# Altium PCB PCB1.PcbDoc
Units mm, origin at the board's own origin, x right, y up, seen from the top; angles counter-clockwise.
Board outline 46.1 x 48.13 mm, 2 copper layers (Top Layer, Bottom Layer); 19 components, 28 nets, 101 pads, 20 vias.
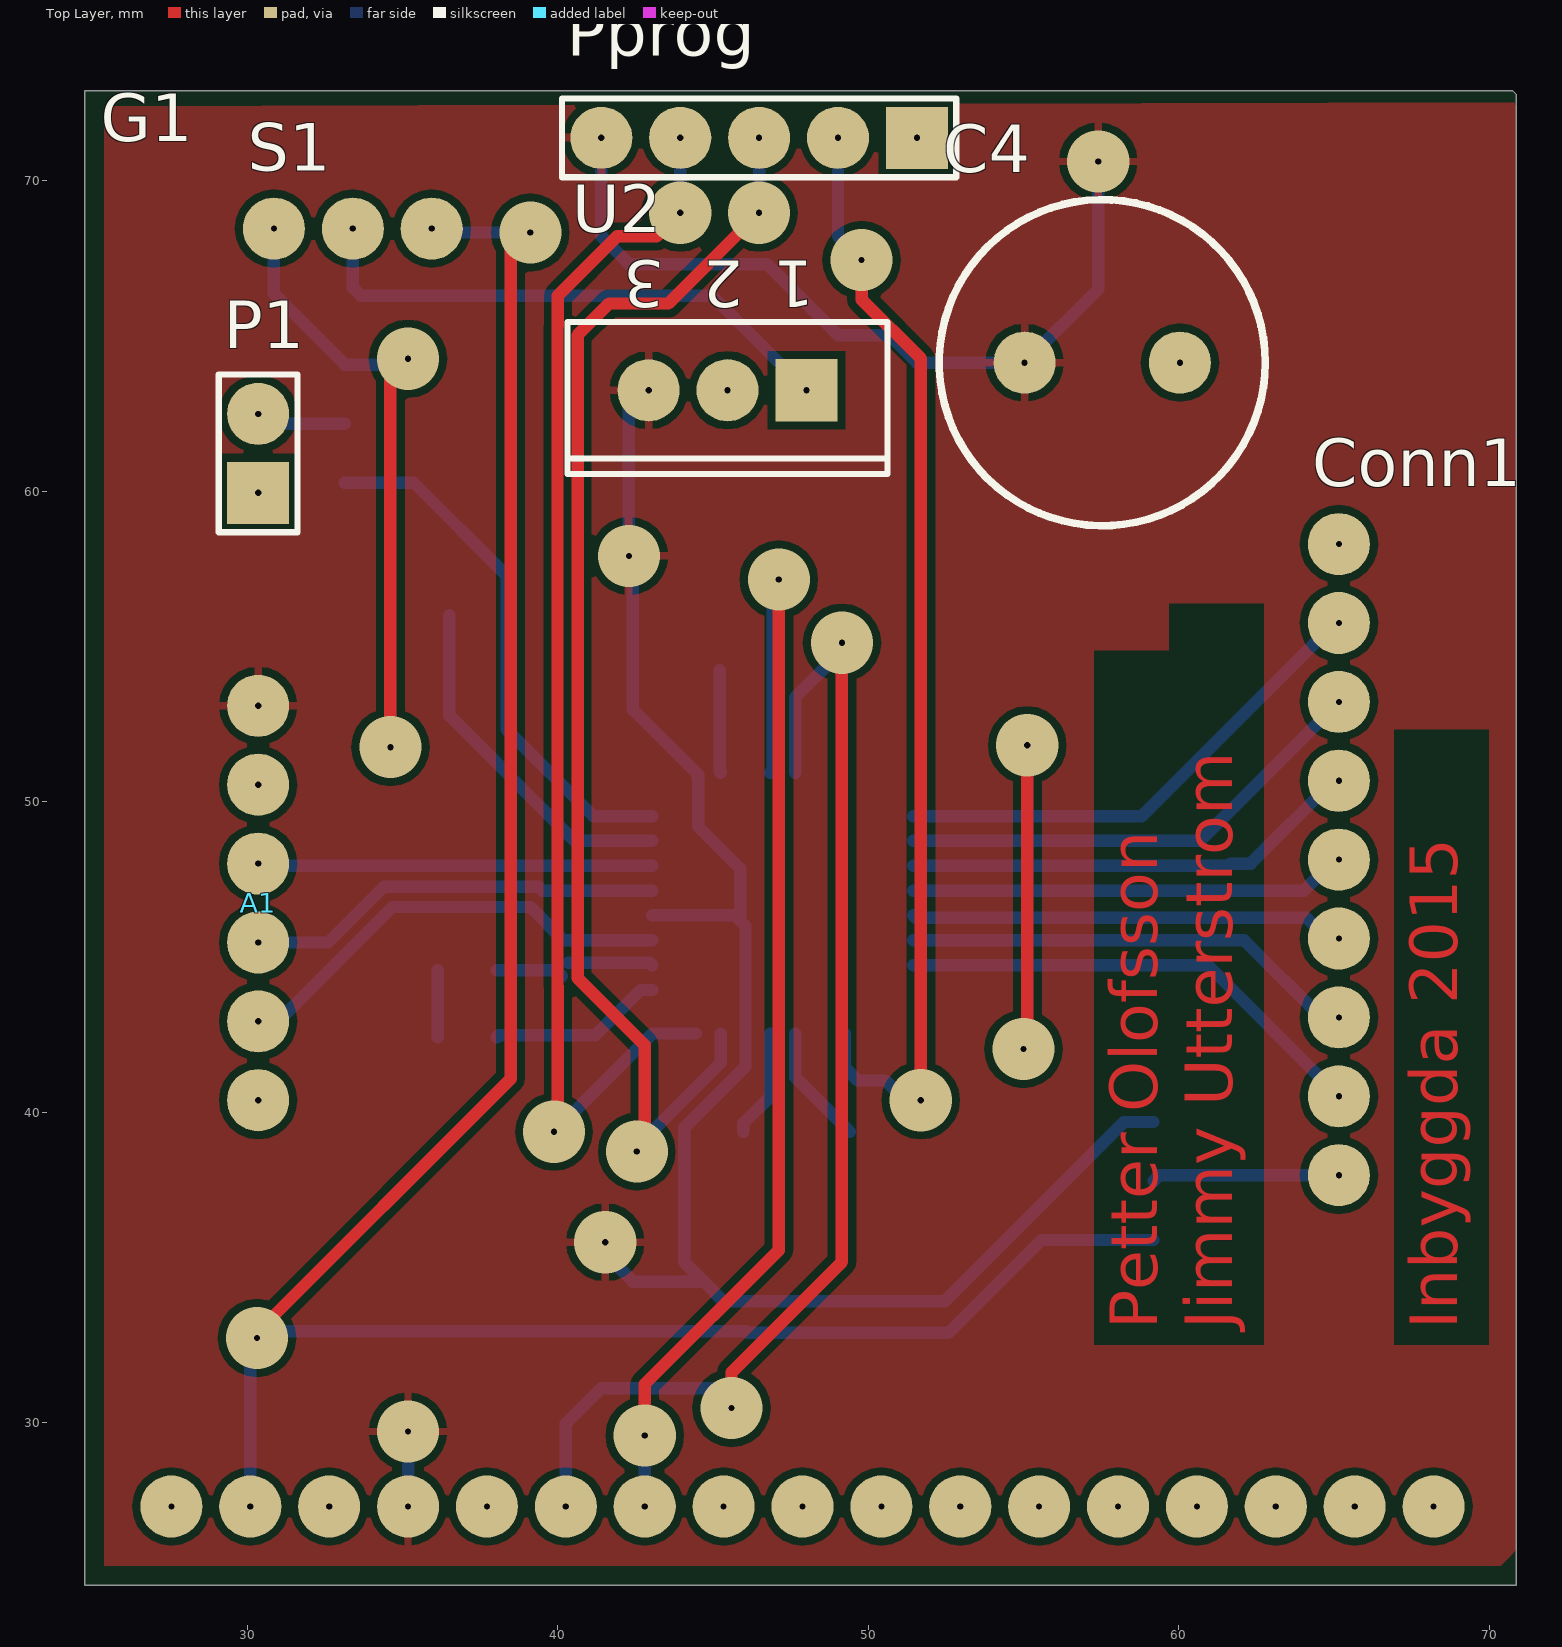
[diagram p0: Top Layer view]
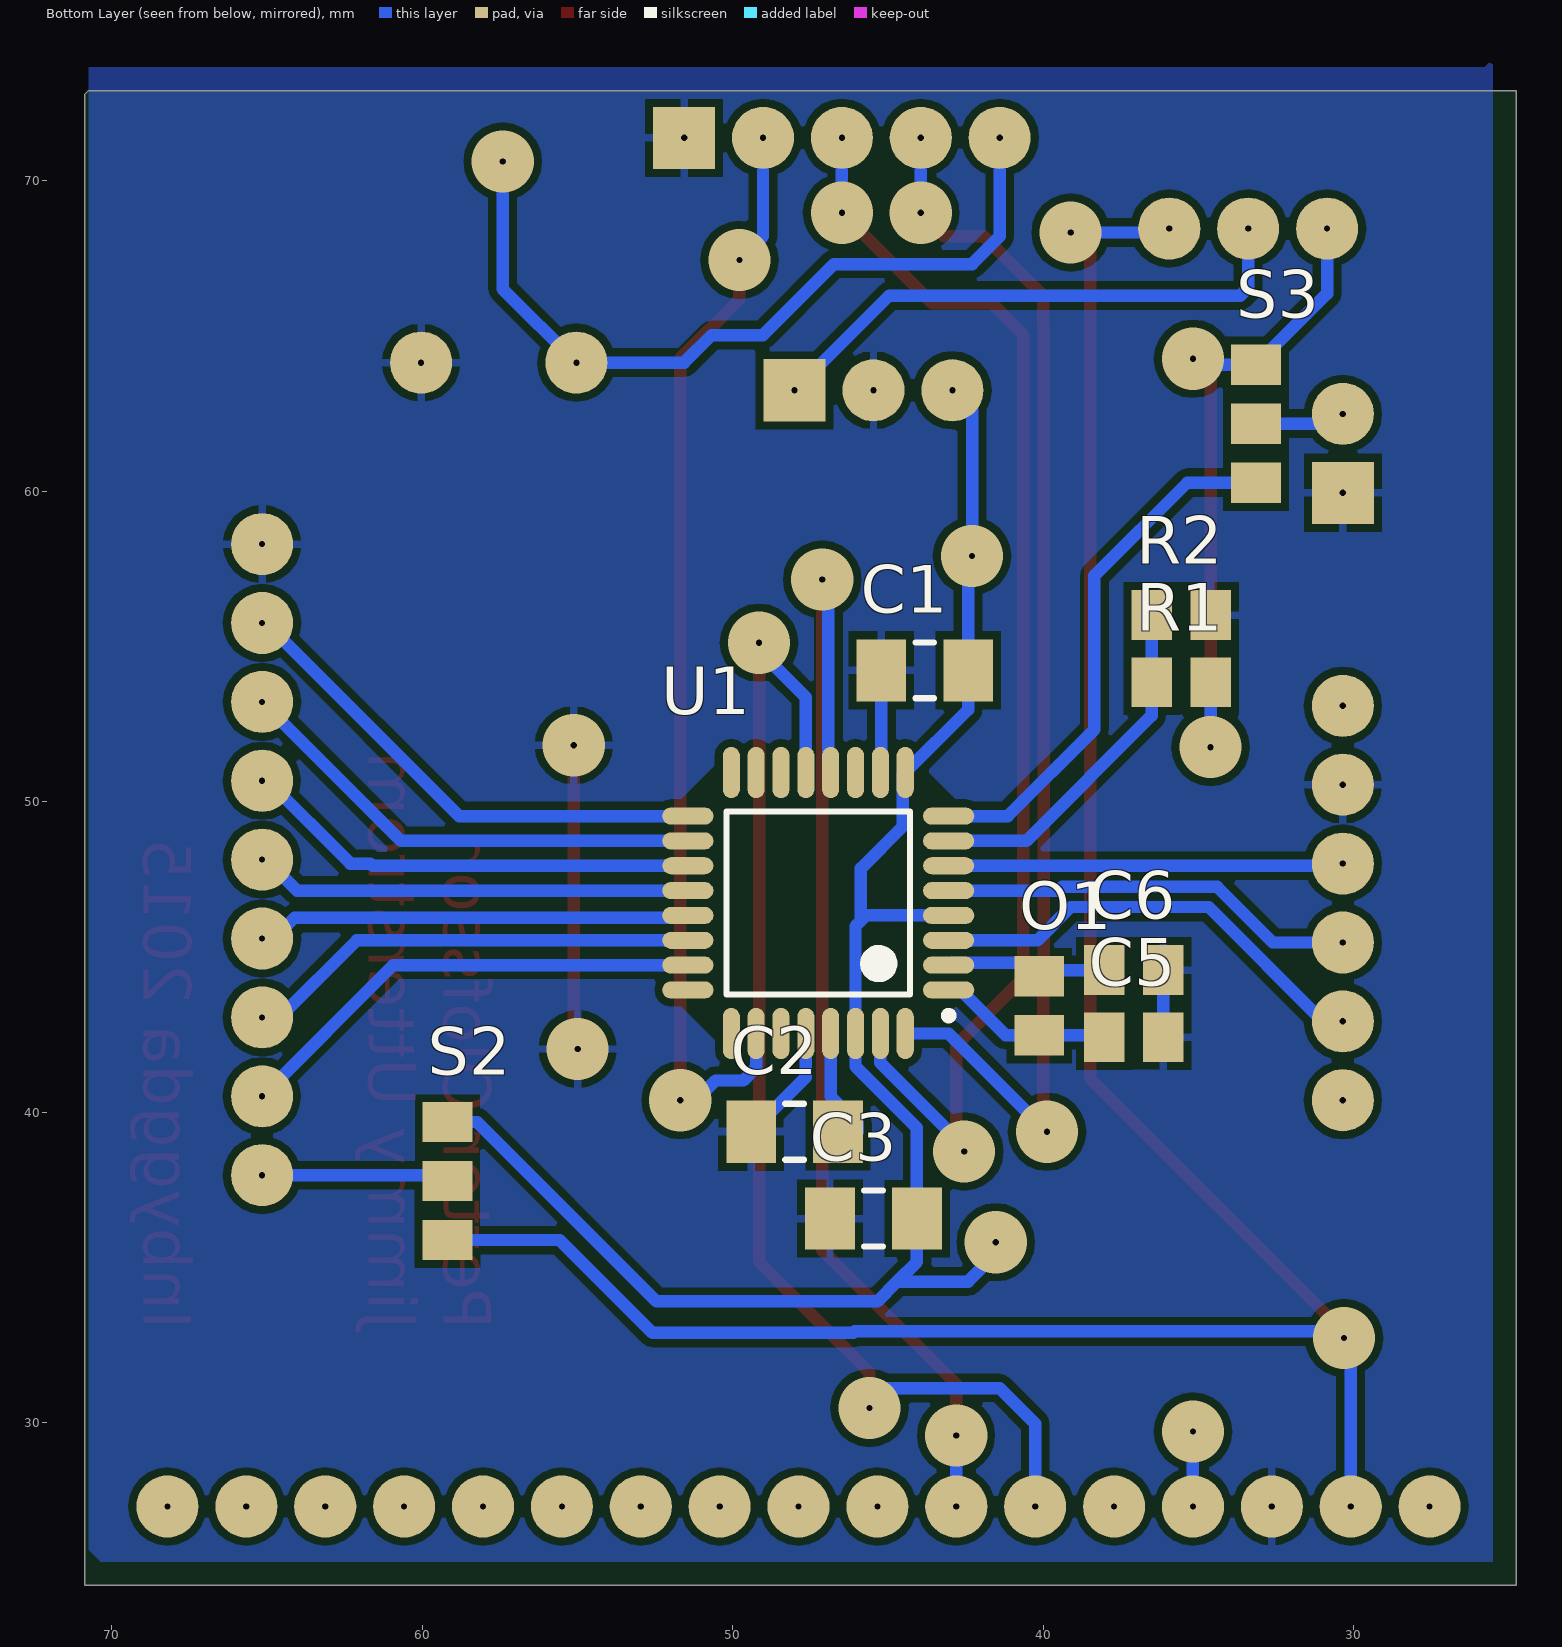
[diagram p1: Bottom Layer view, seen from below]

## Layer stack, top to bottom
Top Layer: signal copper 0.0356
Dielectric: dielectric 0.32, FR-4, Dk 4.8
Bottom Layer: signal copper 0.0356

## Board outline
24.765,72.898 24.765,24.765 70.866,24.765 70.866,72.771 70.739,72.898

## Design rules (kind name [scope] priority, off if disabled: settings)
Clearance [All] p1: gap=0.25
MinimumSolderMaskSliver [All] p1: minsoldermaskwidth=0.01
PolygonConnect [All] p1: connectstyle=Relief reliefconductorwidth=0.254 reliefentries=4 polygonreliefangle="90 Angle"
RoutingVias [All] p1: holewidth=0.2 width=2 viastyle="Through Hole" minholewidth=0.2 minwidth=2 maxholewidth=0.2 maxwidth=2
SilkscreenOverComponentPads [All] p1: minsilkscreentomaskgap=0.254
SolderMaskExpansion [All] p1: expansion=0.102
Width [All] p1: maxlimit=1 minlimit=0.4 preferedwidth=0.4
26 further rules are at their usual default settings.

## Components (designator, comment, footprint, x,y, rotation, side; value= is the part's Value field where it differs from the comment)
A1 "ADXL335" ADXL 30.353,40.386 r90 top
C1 "Cap" R3216-1206 43.815,54.229 r180 bottom
C2 "Cap" R3216-1206 48.006,39.37 r0 bottom
C3 "Cap" R3216-1206 45.466,36.576 r180 bottom
C4 "Cap Pol1" RB5-10.5 57.531,64.135 r0 top
C5 "Cap" R2012-0805 37.084,42.418 r0 bottom
C6 "Cap" R2012-0805 37.084,44.577 r0 bottom
Conn1 "Disp connector" "9pin 2.54" 65.151,37.973 r90 top
G1 "FONA808" FONA808 27.559,27.305 r0 top
O1 "OSC" R2012-0805 40.132,43.434 r90 bottom
P1 "Header 2" HDR1X2 30.353,59.944 r90 top
Pprog "Header 5" HDR1X5 51.562,71.374 r180 top
R1 "Res2" R2012-0805 35.56,53.848 r0 bottom
R2 "Res2" R2012-0805 35.56,56.007 r180 bottom
S1 "SW-SPDT" SW-SPDT2.54mm 35.941,68.453 r180 top
S2 "smd_bridge" SMD_BRIDGE 59.182,38.735 r270 bottom
S3 "smd_bridge" SMD_BRIDGE 33.147,63.119 r270 bottom
U1 "SAMD21e18" TQFP32_N 47.244,46.736 r0 bottom
U2 "7803" 221A-04 45.466,63.246 r180 top

## Footprints (in the part's own frame and the unit in brackets; to place one, negate y for a bottom-side part, rotate by r counter-clockwise, add the part's x,y. Pads: shape width x height; smd on the part's side, far side on the other; paste and mask are expansions set on the pad)
"9pin 2.54" [mm]
  round 2 hole 0.2: 1(0,0) 2(2.54,0) 3(5.08,0) 4(7.62,0) 5(10.16,0) 6(12.7,0) 7(15.24,0) 8(17.78,0) 9(20.32,0)
  body extent -1.1,-1.1 21.42,1.1, height 8
221A-04 [mm] "TO, Thru-Hole, Vertical, Heatsink Mounted; 3 In-Line Leads; Pitch 2.54 mm"
  rect 2x2 hole 0.2: 1(-2.54,0)
  round 2 hole 0.2: 2(0,0) 3(2.54,0)
  silkscreen extent -5.15,-2.2 5.15,2.7
ADXL [mm]
  round 2 hole 0.2: 1(0,0) 2(2.54,0) 3(5.08,0) 4(7.62,0) 5(10.16,0) 6(12.7,0)
  body extent -2.54,-2.54 15.24,22.86, height 6
FONA808 [mm]
  round 2 hole 0.2: 1(0,0) 2(2.54,0) 3(5.08,0) 4(7.62,0) 5(10.16,0) 6(12.7,0) 7(15.24,0) 8(17.78,0) 9(20.32,0) 10(22.86,0) 11(25.4,0) 12(27.94,0) 13(30.48,0) 14(33.02,0) 15(35.56,0) 16(38.1,0) 17(40.64,0)
  body extent -2.54,-2.54 43.18,43.18, height 11
HDR1X2 [mm] "Connector; Header; 2 Position"
  rect 2x2 hole 0.2: 1(0,0)
  round 2 hole 0.2: 2(2.54,0)
  silkscreen extent -1.27,-1.27 3.81,1.27
HDR1X5 [mm] "Connector; Header; 5 Position"
  rect 2x2 hole 0.2: 1(0,0)
  round 2 hole 0.2: 2(2.54,0) 3(5.08,0) 4(7.62,0) 5(10.16,0)
  silkscreen extent -1.27,-1.27 11.43,1.27
R2012-0805 [mm] "SMD 2012-0805"
  rect 1.3x1.6 smd: 1(-0.95,0) 2(0.95,0)
  body extent -1.7,-0.9 1.7,0.9, height 1.45
R3216-1206 [mm] "SMD 3216 - 1206"
  rect 1.6x2 smd: 1(-1.4,0) 2(1.4,0)
  silkscreen extent -0.3,-0.9 0.3,0.9, body extent -2.3,-1.1 2.3,1.1, height 1.85
RB5-10.5 [mm] "Capacitor (Radial); 2 Leads"
  round 2 hole 0.2: 1(-2.5,0) 2(2.5,0)
  silkscreen extent -5.25,-5.25 5.25,5.25
SMD_BRIDGE [mm] "SMD 2012-0805"
  rect 1.3x1.6 smd: 1(-0.95,0) 2(0.95,0) 3(2.85,0)
  body extent -1.7,-0.9 3.6,0.9, height 1
SW-SPDT2.54mm [mm]
  round 2 hole 0.2: 1(0,0) 2(2.54,0) 3(5.08,0)
  body extent -1.1,-1.1 6.18,1.1, height 5
TQFP32_N [mm] "32-Pin Thin Quad Flat Pack 0.8 mm Pitch, IPC Medium Density"
  oval 1.65x0.55 smd: 1(-4.2,2.8) 2(-4.2,2) 3(-4.2,1.2) 4(-4.2,0.4) 5(-4.2,-0.4) 6(-4.2,-1.2) 7(-4.2,-2) 8(-4.2,-2.8) 17(4.2,-2.8) 18(4.2,-2) 19(4.2,-1.2) 20(4.2,-0.4) 21(4.2,0.4) 22(4.2,1.2) 23(4.2,2) 24(4.2,2.8)
  oval 0.55x1.65 smd: 9(-2.8,-4.2) 10(-2,-4.2) 11(-1.2,-4.2) 12(-0.4,-4.2) 13(0.4,-4.2) 14(1.2,-4.2) 15(2,-4.2) 16(2.8,-4.2) 25(2.8,4.2) 26(2,4.2) 27(1.2,4.2) 28(0.4,4.2) 29(-0.4,4.2) 30(-1.2,4.2) 31(-2,4.2) 32(-2.8,4.2)
  silkscreen extent -4.32,-2.95 2.95,3.75, body extent -3.5,-3.5 3.5,3.5, height 1.6

## Part data
C1 C2 C3 C5 C6: "Capacitor"
C4: "Polarized Capacitor (Radial)"
O1: library part Res2, "Resistor"
P1: "Header, 2-Pin"
Pprog: "Header, 5-Pin"
R1 R2: "Resistor"
S1: "SPDT Subminiature Toggle Switch, Right Angle Mounting, Vertical Actuation"
U2: "3-Terminal Positive Fixed Voltage Regulator"

## Via types
v1: diameter 2, hole 0.2, Top Layer to Bottom Layer, 20 vias

## Nets (pads, with @x,y where several pads share a name; then routed paths per layer and width w, separated by ;. In a path a pad name is that pad's centre, name@x,y a point inside that pad or via, vN(x,y) a via of type N, cw(c..) or ccw(c..) an arc to the next point about the centre after c; other vN are vias at no path point)
"ACC X": A1.4 U1.6 | length 12.7
  Bottom Layer w0.4: A1.4 30.423,47.936 U1.6
"ACC Y": A1.3 U1.5 | length 13.5
  Bottom Layer w0.4: A1.3 32.609,45.466 34.402,47.259 39.385,47.259 39.508,47.136 U1.5
"ACC Z": A1.2 U1.3 | length 14
  Bottom Layer w0.4: A1.2@30.988,42.926 34.671,46.609 39.116,46.609 40.189,45.536 U1.3
"EXT POW": R1.1 S1.3 S3.1 | length 22.4
  Top Layer w0.4: v1(34.61,51.755) 34.61,63.82 35.052,64.262 v1(35.179,64.262)
  Bottom Layer w0.4: S1.3 30.861,66.355 S3.1 34.986,64.069 v1(35.179,64.262) ; v1(34.61,51.755) R1.1
"EXT POW MEAS": R1.2 R2.1 U1.7 | length 11.4
  Bottom Layer w0.4: R1.2 36.51,52.771 40.545,48.736 U1.7 ; R1.2@36.51,53.914 R2.1
"FONA BAT": G1.2 S1.1 S2.3 | length 77.8
  Top Layer w0.4: v1(30.316,32.729) 30.226,32.819 38.481,41.074 v1@38.481,68.326
  Bottom Layer w0.4: v1@29.998,33.046 v1(30.316,32.729) ; G1.2 30.099,32.512 v1(30.316,32.729) ; S1.1 36.068,68.326 v1@38.481,68.326 ; S2.3 55.57,35.885 52.578,32.893 46.12,32.893 46.067,32.946 30.533,32.946 v1(30.316,32.729)
  other v1: 39.116,68.326
"FONA RX": G1.6 U1.13 | length 38.9
  Top Layer w0.4: v1(45.593,30.48) 45.593,31.623 49.149,35.179 v1(49.149,55.118)
  Bottom Layer w0.4: G1.6 40.259,29.972 41.402,31.115 v1@45.085,31.115 ; U1.13 47.644,53.359 49.149,54.864 v1(49.149,55.118)
"FONA TX": G1.7 U1.12 | length 38
  Top Layer w0.4: v1(42.799,29.591) 42.799,31.242 47.117,35.56 v1(47.117,57.15)
  Bottom Layer w0.4: G1.7 v1(42.799,29.591) ; U1.12 46.919,51.011 46.919,56.952 v1(47.117,57.15)
GND: A1.5 C1.1 C2.2 C3.1 C4.2 C5.1 C6.1 Conn1.9 G1.3 P1.1 Pprog.1 R2.2 U1.10 U1.28 U2.2 | length 21.2
  Top Layer w0.4: v1(54.991,42.037) 55.118,41.91 v1(55.118,51.816)
  Bottom Layer w0.4: C5.1 C6.1 ; C1.1 45.215,50.965 U1.10 ; U2.2@45.215,62.995 U2.2 ; U1.28 47.644,41.132 C2.2 ; v1@54.356,42.037 v1(54.991,42.037) ; C4.2@60.031,63.413 C4.2
KADENS!!: S3.3 U1.8 | length 17.2
  Bottom Layer w0.4: S3.3 35.362,60.269 38.354,57.277 38.354,52.324 41.142,49.536 U1.8
KEY: G1.9
NetC2_1: C2.1 U1.29 | length 3.5
  Bottom Layer w0.4: C2.1@45.971,39.37 45.971,39.64 46.844,40.513 U1.29
NetC5_2: C5.2 O1.1 U1.1 | length 5.6
  Bottom Layer w0.4: C5.2 38.1,42.484 O1.1 41.214,42.484 42.666,43.936 U1.1
NetC6_2: C6.2 O1.2 U1.2 | length 4.9
  Bottom Layer w0.4: C6.2 39.939,44.577 O1.2 ; O1.2@40.34,44.811 42.969,44.811 U1.2
NetConn1_1: Conn1.1 S2.2 | length 6.1
  Bottom Layer w0.4: S2.2@59.187,37.78 S2.2 59.37,37.973 Conn1.1
NetConn1_2: Conn1.2 U1.23 | length 15.5
  Bottom Layer w0.4: U1.23 60.928,44.736 Conn1.2
NetConn1_3: Conn1.3 U1.22 | length 14.7
  Bottom Layer w0.4: U1.22 62.103,45.536 64.586,43.053 Conn1.3
NetConn1_4: Conn1.4 U1.21 | length 14
  Bottom Layer w0.4: U1.21 51.519,46.261 64.102,46.261 64.77,45.593 Conn1.4
NetConn1_5: Conn1.5 U1.20 | length 14.1
  Bottom Layer w0.4: U1.20 64.027,47.136 65.024,48.133 Conn1.5
NetConn1_6: Conn1.6 U1.19 | length 14.8
  Bottom Layer w0.4: U1.19 61.595,47.936 61.665,48.006 62.308,48.006 64.975,50.673 Conn1.6
NetConn1_7: Conn1.7 U1.18 | length 15.6
  Bottom Layer w0.4: U1.18 60.674,48.736 Conn1.7
NetConn1_8: Conn1.8 U1.17 | length 16.3
  Bottom Layer w0.4: U1.17 58.807,49.536 65.024,55.753 Conn1.8
NetP1_2: P1.2 S3.2 | length 2.9
  Bottom Layer w0.4: P1.2 30.668,62.169 S3.2
RESET: Pprog.2 U1.26 | length 36.1
  Top Layer w0.4: v1(49.784,67.437) 49.784,66.167 51.689,64.262 v1(51.689,40.386)
  Bottom Layer w0.4: Pprog.2 49.022,68.199 v1(49.784,67.437) ; U1.26 49.244,41.434 49.657,41.021 50.546,41.021 51.181,40.386 v1(51.689,40.386)
SWCLK: Pprog.3 U1.31 | length 42.7
  Top Layer w0.4: v1(42.545,38.735) 42.799,38.989 42.799,42.164 40.64,44.323 40.64,65.024 41.656,66.04 43.561,66.04 v1(46.482,68.961)
  Bottom Layer w0.4: v1@43.053,38.481 42.799,38.735 v1(42.545,38.735) 42.545,38.892 45.244,41.591 U1.31 ; v1(46.482,68.961) Pprog.3
SWDIO: Pprog.4 U1.32 | length 40.7
  Top Layer w0.4: v1(39.878,39.37) 40.005,39.497 40.005,44.039 39.99,44.054 39.99,65.308 40.005,65.323 40.005,66.294 41.91,68.199 43.18,68.199 v1(43.942,68.961)
  Bottom Layer w0.4: v1(39.878,39.37) 43.044,42.536 U1.32 ; v1@43.434,68.961 v1@43.688,69.215 ; v1(43.942,68.961) Pprog.4
VCC: A1.6 C1.2 C3.2 C4.1 G1.4 Pprog.5 S2.1 U1.4 U1.9 U1.30 U2.3 | length 86.5
  Top Layer w0.4: v1(41.529,35.814) v1@41.91,35.433 ; v1@42.545,58.166 v1(42.291,57.912) v1@42.799,57.912
  Bottom Layer w0.4: G1.4 v1(35.179,29.718) ; Pprog.5 41.402,68.199 42.291,67.31 46.736,67.31 49.022,65.024 50.673,65.024 51.562,64.135 C4.1 57.404,66.508 v1(57.404,70.612) ; v1(41.529,35.814) 41.148,35.814 42.416,34.546 44.702,34.546 ; U2.3 42.291,62.611 v1(42.291,57.912) 42.291,57.531 42.799,57.531 42.415,57.147 C1.2 42.415,52.965 U1.9 44.519,50.861 44.519,49.207 45.872,47.854 45.872,46.164 ; U1.4 45.701,46.336 45.872,46.164 ; S2.1 58.227,39.685 52.451,33.909 45.339,33.909 44.702,34.546 ; 44.702,34.546 44.066,35.182 C3.2 44.069,36.579 44.069,39.497 46.044,41.472 U1.30 46.044,45.993 45.872,46.164
VIN: S1.2 U2.1 | length 17.9
  Bottom Layer w0.4: S1.2 33.401,66.548 33.655,66.294 44.958,66.294 U2.1
pads on no net: A1.1 G1.1 G1.5 G1.8 G1.10 G1.11 G1.12 G1.13 G1.14 G1.15 G1.16 G1.17 U1.11 U1.14 U1.15 U1.16 U1.24 U1.25 U1.27

## Polygon pours and split planes (outlines as drawn)
GND on Bottom Layer "Top Layer-No Net 1" (solid, pour order 4): 25.527,25.527 25.527,73.914 25.786,73.653 70.739,73.653 70.739,25.918 70.35,25.527
VCC on Top Layer "Top Layer-No Net 1" (solid, pour order 6): 25.273,72.39 25.4,72.263 25.4,25.4 70.358,25.4 70.612,25.654 70.866,25.908 70.866,72.517

## Other copper
Top Layer:
  text "Petter Olofsson" at 59.309,33.02 h1.52 r90
  text "Jimmy Utterstrom" at 61.722,33.02 h1.52 r90
  text "Inbyggda 2015" at 68.961,33.02 h1.52 r90
Bottom Layer:
  pour cut-out: 44.45,51.689 42.291,49.536 42.291,43.942 44.45,41.783 50.038,41.783 52.197,43.942 52.197,49.536 50.038,51.689

## Text inside footprints (layer, text, board x,y; h text height)
U2: Top Overlay "1" at 48.256,67.421 h1.5 r180; Top Overlay "2" at 45.966,67.421 h1.5 r180; Top Overlay "3" at 43.426,67.421 h1.5 r180